# Altium PCB PCB1.PcbDoc
Units mil, origin at the board's own origin, x right, y up, seen from the top; angles counter-clockwise.
Board outline 3540 x 2100.23 mil, 2 copper layers (Top Layer, Bottom Layer); 18 components, 15 nets, 161 pads, 3 vias.
Unrouted connection lines stored in the file: 20.
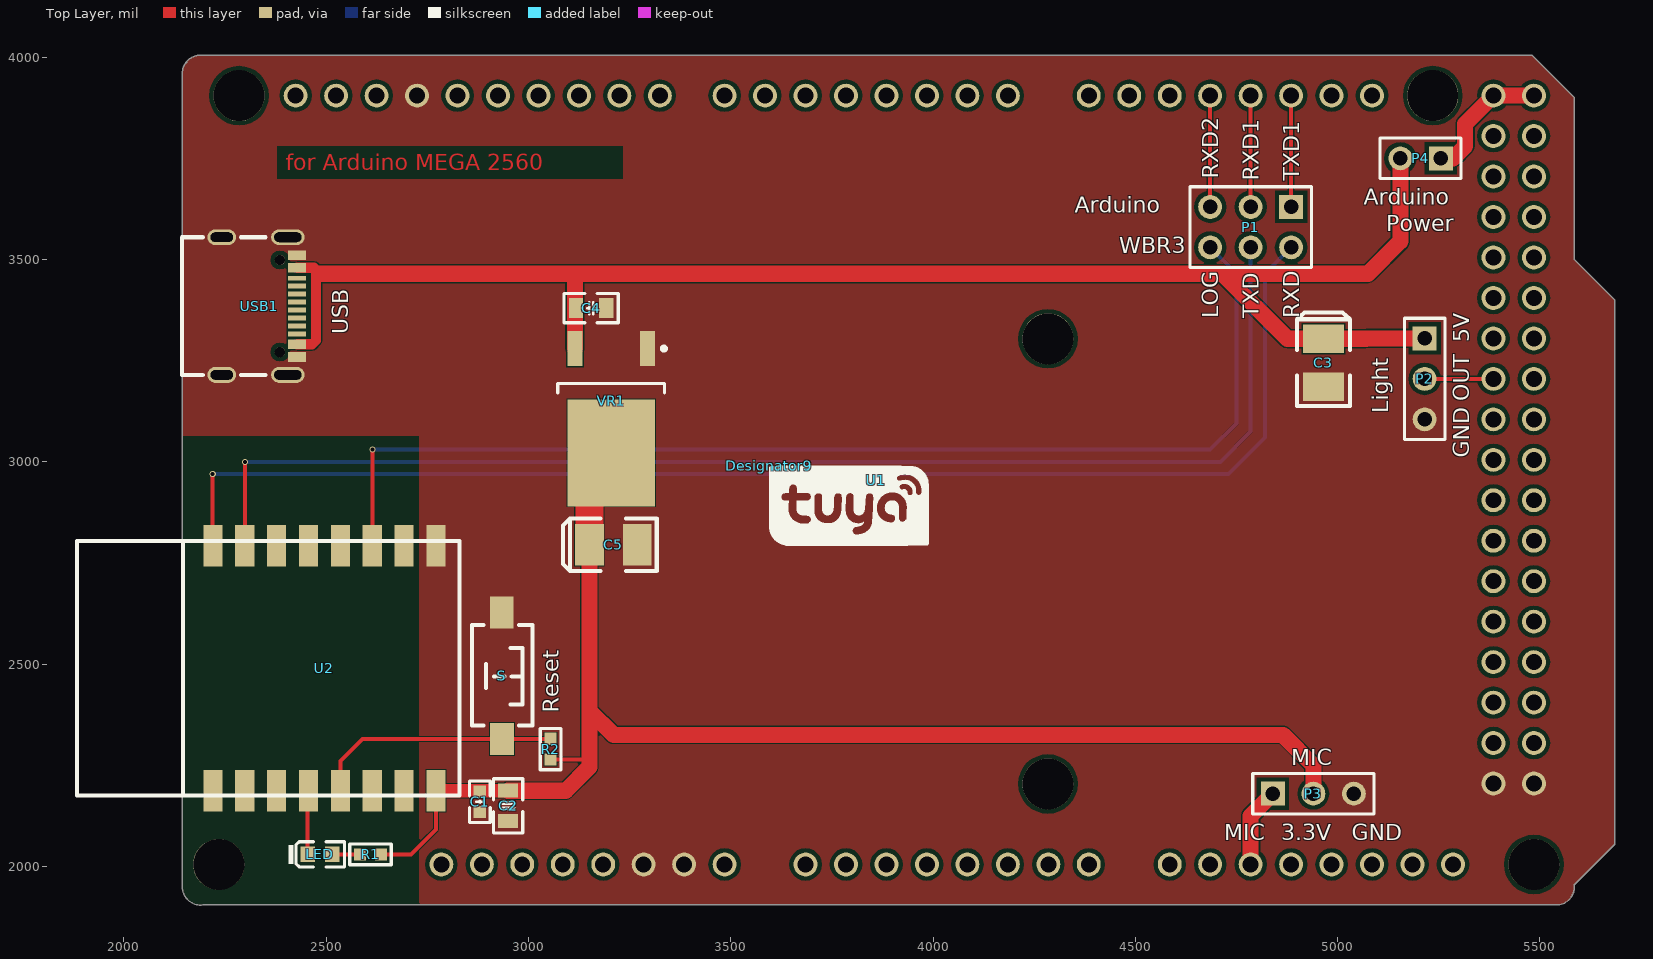
[diagram p0: Top Layer view]
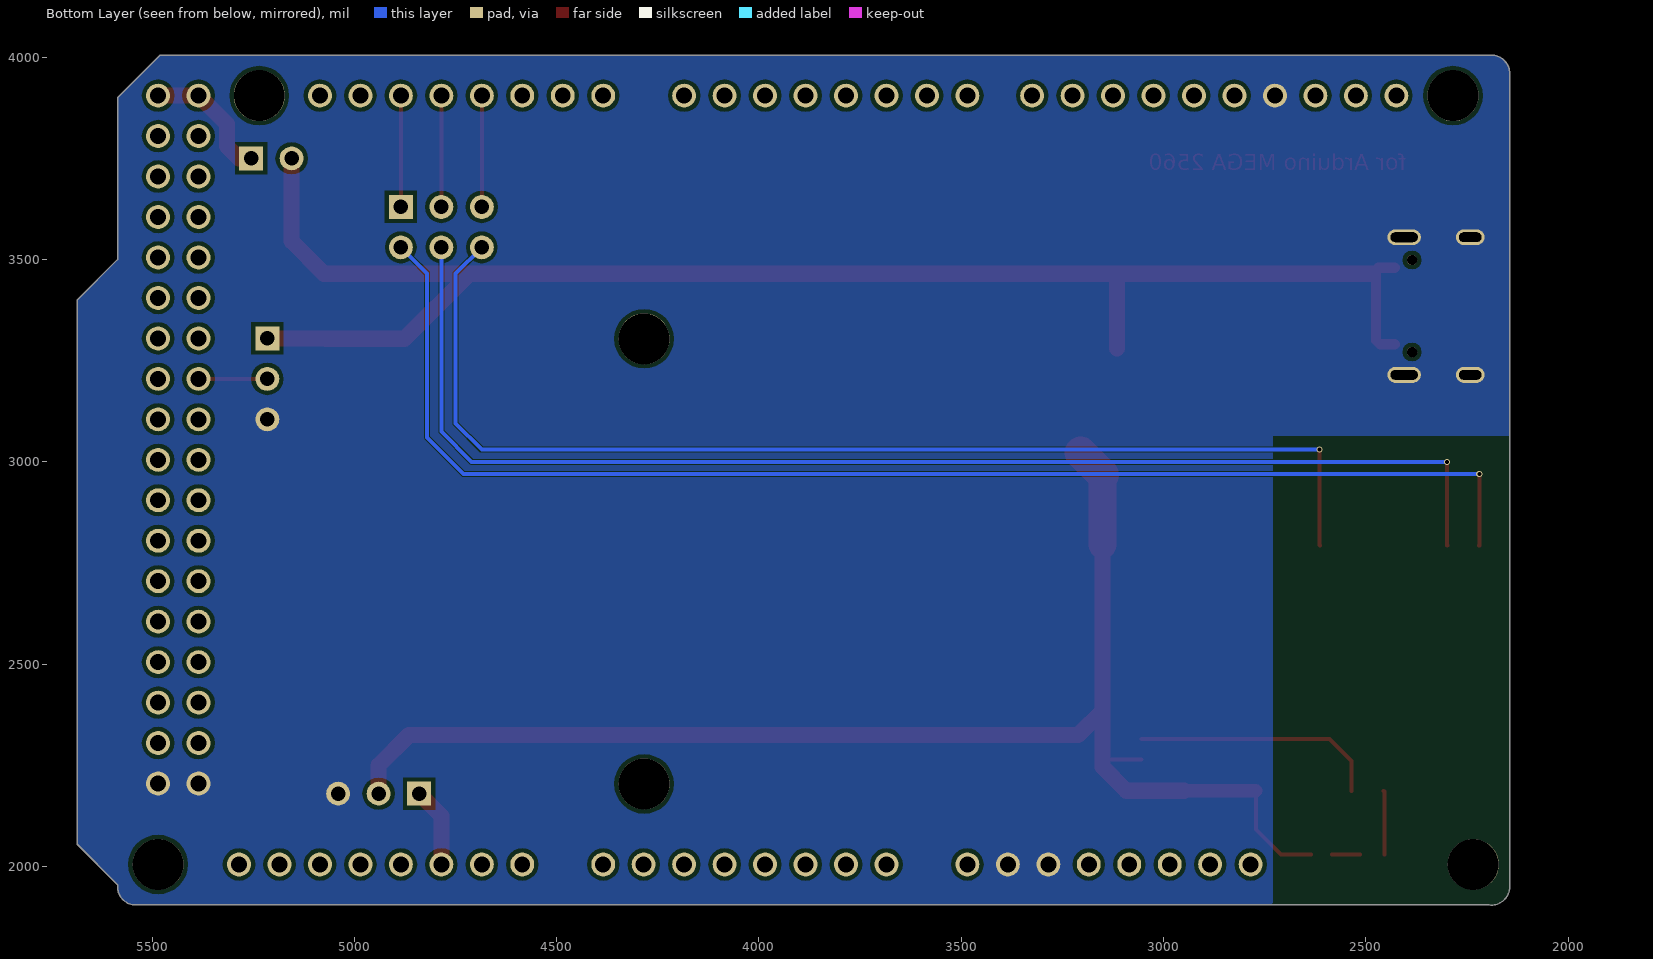
[diagram p1: Bottom Layer view, seen from below]

## Layer stack, top to bottom
Top Solder: solder mask 0.4, Solder Resist, Dk 3.5
Top Layer: signal copper 1.4
Dielectric 1: dielectric 12.6, FR-4, Dk 4.8
Bottom Layer: signal copper 1.4
Bottom Solder: solder mask 0.4, Solder Resist, Dk 3.5

## Board outline
2145,1945 ccw(c2190,1950) 2195,1905 5545,1905 ccw(c5540,1950) 5585,1955 5685,2055 5685,3400 5585,3500 5585,3900 5480,4005 2190,4005 ccw(c2190,3960) 2145,3960

## Design rules (kind name [scope] priority, off if disabled: settings)
Clearance [All] p1: gap=3 ignorepadtopadclearanceinfootprint=FALSE except(0: Arc-Hole Track-Hole SMDPad-Hole THPad-Hole Via-Hole Fill-Hole Poly-Hole Region-Hole Text-Hole; 10: THPad-Via THPad-Fill THPad-Poly THPad-Region THPad-Text Via-Via Via-Fill Via-Poly Via-Region Via-Text Fill-Fill Fill-Poly Fill-Region Fill-Text Poly-Poly Poly-Region Poly-Text Region-Region Region-Text Text-Text)
ComponentClearance [All] p1 off: gap=10 collisioncheckmode=3 verticalgap=10 showdistances=FALSE
HoleSize [All] p1 off: absolutevalues=TRUE maxlimit=100 minlimit=1 maxpercent=80.000 minpercent=20.000
MinimumSolderMaskSliver [All] p1 off: minsoldermaskwidth=10
PlaneConnect [All] p1: planeconnectstyle=Direct reliefexpansion=20 reliefentries=4 reliefconductorwidth=10 reliefairgap=10
PolygonConnect [All] p1: connectstyle=Direct reliefconductorwidth=10 reliefentries=4 polygonreliefangle="90 Angle" airgapwidth=10
RoutingVias [All] p1: holewidth=28 width=50 viastyle="Through Hole" minholewidth=28 minwidth=50 maxholewidth=28 maxwidth=50
SilkToSolderMaskClearance [IsPad] p1 off: minsilkscreentomaskgap=10 clearancetoexposedcopper=TRUE
SolderMaskExpansion [All] p1: expansion=4
Width [All] p1: maxlimit=100 minlimit=10 preferedwidth=10 minimp=50.000000 maximp=50.000000 favimp=50.000000
25 further rules are at their usual default settings.

## Classes and differential pairs
component class Sheet1: C1 C2 C3 C4 C5 LED P1 P2 P3 P4 R1 R2 S U1 U2 USB1 VR1

## Components (designator, comment, footprint, x,y, rotation, side; value= is the part's Value field where it differs from the comment)
C1 "Cap" "C 0603_L" 2880,2160 r90 top value=100nF
C2 "Cap" "C 0805_L" 2950,2150 r90 top value=10uF
C3 "100uF (107) ±10% 6.3V" CASE-B_3528 4965,3245 r90 top
C4 "10uF (106) 10% 25V" "C 0805_L" 3155,3380 r180 top
C5 "100uF (107) ±10% 6.3V" CASE-B_3528 3210,2795 r180 top
Designator9 "Comment" toya_logo 3595,2990 r0 top
LED "LED0" 0603_LED_S1 2485,2030 r0 top
P1 "Header 3X2" HDR2X3 4885,3630 r180 top
P2 "Header 3" HDR1X3 5215,3305 r270 top
P3 "Header 3" HDR1X3 4840,2180 r0 top
P4 "Header 2" HDR1X2 5255,3750 r180 top
R1 "Res2" "R 0603_L" 2610,2030 r180 top value=1K
R2 "Res2" "R 0603_L" 3055,2290 r90 top value=1K
S "SW-PB" "TSW SMD-3*6*2.5" 2935,2470 r270 top
U1 "arduino mega" "arduino mega" -1215,-295 r0 top locked
U2 "WIFI_BLE_WBR3" WBR3 1885,2175 r90 top
USB1 "TYPE-C 16P(073)" USB-C-SMD_TYPE-C16PIN 2140,3385 r270 top
VR1 "ME1117A33K3G" TO-252 3204.76,3106.77 r270 top

## Footprints (in the part's own frame and the unit in brackets; to place one, negate y for a bottom-side part, rotate by r counter-clockwise, add the part's x,y. Pads: shape width x height; smd on the part's side, far side on the other; paste and mask are expansions set on the pad)
0603_LED_S1 [mm]
  rect 0.93x0.98 smd: A(0.77,0) K(-0.77,0)
  silkscreen extent -1.98,-0.79 1.54,0.79, body extent -0.8,-0.4 0.8,0.4, height 0.6
"arduino mega" [mm]
  round 1.5 hole 1: 0(137.16,106.68) 1(134.62,106.68) 2(132.08,106.68) 3(129.54,106.68) 4(127,106.68) 5(124.46,106.68) 6(121.92,106.68) 7(119.38,106.68) 8(115.316,106.68) 9(112.776,106.68) 10(110.236,106.68) 11(107.696,106.68) 12(105.156,106.68) 13(102.616,106.68) 14(142.24,106.68) 15(144.78,106.68) 16(147.32,106.68) 17(149.86,106.68) 18(152.4,106.68) 19(154.94,106.68) 20(157.48,106.68) 21(160.02,106.68) 22(167.64,104.14) 23(170.18,104.14) 24(167.64,101.6) 25(170.18,101.6) 26(167.64,99.06) 27(170.18,99.06) 28(167.64,96.52) 29(170.18,96.52) 30(167.64,93.98) 31(170.18,93.98) 32(167.64,91.44) 33(170.18,91.44) 34(167.64,88.9) 35(170.18,88.9) 36(167.64,86.36) 37(170.18,86.36) 38(167.64,83.82) 39(170.18,83.82) 40(167.64,81.28) 41(170.18,81.28) 42(167.64,78.74) 43(170.18,78.74) 44(167.64,76.2) 45(170.18,76.2) 46(167.64,73.66) 47(170.18,73.66) 48(167.64,71.12) 49(170.18,71.12) 50(167.64,68.58) 51(170.18,68.58) 52(167.64,66.04) 53(170.18,66.04) 54(94.996,106.68) 55(92.456,106.68) 60(124.46,58.42) 61(127,58.42) 62(129.54,58.42) 63(132.08,58.42) 64(134.62,58.42) 65(137.16,58.42) 66(139.7,58.42) 67(142.24,58.42) 68(147.32,58.42) 69(149.86,58.42) 70(152.4,58.42) 71(154.94,58.42) 72(157.48,58.42) 73(160.02,58.42) 74(162.56,58.42) 75(165.1,58.42) 80(97.536,106.68) 81(100.076,106.68) 82(101.6,58.42) 83(104.14,58.42) 84(106.68,58.42) 85(109.22,58.42) 86(111.76,58.42) 87(114.3,58.42) 88(116.84,58.42) 89(119.38,58.42) 90(167.64,106.68) 91(170.18,106.68) 92(167.64,63.5) 93(170.18,63.5)
  round 3.2 hole 3.2 unplated: ""(87.63,58.42) ""(88.9,106.68) ""(139.675,63.476) ""(139.675,91.416) ""(163.83,106.68) ""(170.18,58.42)
"C 0603_L" [mil] "无极性贴片电容                                       淘宝ID:黄晶宝石"
  rect 30x30 smd: 1(-25.59,0) 2(25.59,0)
  silkscreen extent -51,-26 51,26, body extent -31,-16 31,16, height 32
"C 0805_L" [mil] "无极性贴片电容                                        淘宝ID:黄晶宝石"
  rect 35x50 smd: 1(-37.4,0) 2(37.4,0)
  silkscreen extent -67,-36 67,36, body extent -39,-24 39,24, height 20
CASE-B_3528 [mm]
  rect 1.8x2.6 smd: 1(1.5,0) 2(-1.5,0)
  silkscreen extent -2.73,-1.65 3.16,1.65, body extent -1.85,-1.47 1.85,1.46, height 2.03
HDR1X2 [mm] "Connector; Header; 2 Position"
  rect 1.5x1.5 hole 0.9: 1(0,0)
  round 1.5 hole 0.9: 2(2.54,0)
  silkscreen extent -1.27,-1.27 3.81,1.27
HDR1X3 [mm] "Connector; Header; 3 Position"
  rect 1.5x1.5 hole 0.9: 1(0,0)
  round 1.5 hole 0.9: 2(2.54,0) 3(5.08,0)
  silkscreen extent -1.27,-1.27 6.35,1.27
HDR2X3 [mm] "Connector; Header; 3x2 Position"
  rect 1.5x1.5 hole 0.9: 1(0,0)
  round 1.5 hole 0.9: 2(0,2.54) 3(2.54,0) 4(2.54,2.54) 5(5.08,0) 6(5.08,2.54)
  silkscreen extent -1.27,-1.27 6.35,3.81
"R 0603_L" [mil] "1/10W贴片电阻                 淘宝ID:黄晶宝石"
  rect 30x30 smd: 1(-25.59,0) 2(25.59,0)
  silkscreen extent -51,-26 51,26, body extent -31,-16 32,16, height 16
TO-252 [mm]
  rect 2.2x0.95 smd: 1(-4.4,2.28) 3(-4.4,-2.28)
  rect 6.7x5.5 smd: 2(2.15,0)
  silkscreen extent -4.52,-3.35 -1.6,3.43, body extent -4.9,-3.27 5.04,3.27, height 2.39
toya_logo [mil]
  silkscreen extent 0,-197 395,0
"TSW SMD-3*6*2.5" [mm] "3*6*2.5mm"
  rect 2x1.5 smd: 1(-3.996,-0.02) 2(3.937,0)
  silkscreen extent -3.21,-1.9 3.09,1.9, body extent -4,-1.88 4,1.62, height 2.59
USB-C-SMD_TYPE-C16PIN [mm] "C668624"
  oval 1x2.099 hole 0.6 slot 1.7 at 90 deg: 1(-4.32,6.75) 2(4.32,6.75)
  oval 1x1.799 hole 0.6 slot 1.4 at 90 deg: 3(-4.32,2.6) 4(4.32,2.6)
  rect 0.6x1.15 smd: A1B12(-3.2,7.325) A4B9(-2.4,7.325) B1A12(3.2,7.325) B4A9(2.4,7.325)
  rect 0.3x1.15 smd: A5(-1.25,7.325) A6(-0.25,7.325) A7(0.25,7.325) A8(1.25,7.325) B5(1.75,7.325) B6(0.75,7.325) B7(-0.75,7.325) B8(-1.75,7.325)
  round 0.65 hole 0.65 unplated: ""(-2.89,6.25) ""(2.89,6.25)
  silkscreen extent -4.32,0.1 4.32,5.34
WBR3 [mm]
  rect 2.6x1.2 smd: 1(0.3,-8.52) 2(0.3,-10.52) 3(0.3,-12.52) 4(0.3,-14.52) 5(0.3,-16.52) 6(0.3,-18.52) 7(0.3,-20.52) 8(0.3,-22.52) 9(15.7,-22.52) 10(15.7,-20.52) 11(15.7,-18.52) 12(15.7,-16.52) 13(15.7,-14.52) 14(15.7,-12.52) 15(15.7,-10.52) 16(15.7,-8.52)
  silkscreen extent 0,-24 16,0

## Part data
C1 C2: "Capacitor", LatestRevisionDate=17-Jul-2002, LatestRevisionNote="Re-released for DXP Platform.", PackageDescription="Radial Cap, Thru-Hole; 2 Leads; 0.3 in Pin Spacing", PackageReference=RAD-0.3, Published=8-Jun-2000, Publisher="Altium Limited"
C3 C5: library part "3528 100uF (107) 10% 6.3V", "钽电容", Package=3528, SuppliersPartNumber=C16133, ComponentLink1Description=供应商链接, ComponentLink1URL=http://www.szlcsc.com/product/details_16815.html, Supplier=LC
C4: library part "0805 10uF (106) 10% 25V", "贴片电容", Package=0805, SuppliersPartNumber=C15850, ComponentLink1Description=供应商链接, ComponentLink1URL=http://www.szlcsc.com/product/details_16532.html, Supplier=LC
LED: "Typical INFRARED GaAs LED", LatestRevisionDate=08-Jul-2005, LatestRevisionNote="Mech Layer 1 removed.", PackageDescription="LED; 2 Leads", PackageReference=LED-0, Published=8-Jun-2000, Publisher="Altium Limited"
P1: "Header, 3-Pin, Dual row", LatestRevisionDate=17-Jul-2002, LatestRevisionNote="Re-released for DXP Platform.", Publisher="Altium Limited"
P2 P3: "Header, 3-Pin", LatestRevisionDate=17-Jul-2002, LatestRevisionNote="Re-released for DXP Platform.", Publisher="Altium Limited"
P4: "Header, 2-Pin", LatestRevisionDate=17-Jul-2002, LatestRevisionNote="Re-released for DXP Platform.", Publisher="Altium Limited"
R1 R2: "Resistor", LatestRevisionDate=17-Jul-2002, LatestRevisionNote="Re-released for DXP Platform.", PackageDescription="Axial Device, Thru-Hole; 2 Leads; 0.4 in Pin Spacing", PackageReference=AXIAL-0.4, Published=8-Jun-2000, Publisher="Altium Limited"
S: "Switch", LatestRevisionDate=17-Jul-2002, LatestRevisionNote="Re-released for DXP Platform.", PackageDescription="Switch; 2 Leads", PackageReference=SPST-2, Published=24-Mar-1999, Publisher="Altium Limited"
U2: library part WBR3, "Module"
USB1: BOM_Manufacturer="SHOU HAN", BOM_Manufacturer Part="TYPE-C 16P(073)", BOM_Supplier=LCSC, BOM_Supplier Part=C668624, Contributor=LCSC, spicePre=U, spiceSymbolName="TYPE-C 16P(073)"
VR1: library part "SOT-223 AMS1117-3.3", "低压差线性稳压(LDO)", Package=SOT-223, SuppliersPartNumber=C427608, ComponentLink1Description=供应商链接, ComponentLink1URL=https://item.szlcsc.com/421848.html, Supplier=LC

## Via types
v1: diameter 15, hole 10, Top Layer to Bottom Layer, 3 vias

## Nets (pads, with @x,y where several pads share a name; then routed paths per layer and width w, separated by ;. In a path a pad name is that pad's centre, name@x,y a point inside that pad or via, vN(x,y) a via of type N, cw(c..) or ccw(c..) an arc to the next point about the centre after c; other vN are vias at no path point)
3.3V: C1.2 C2.2 C5.1 P3.2 R1.1 R2.1 U2.8 VR1.2 | length 3477.6
  Top Layer w10: R1.1 2710,2030 2771.61,2091.61 U2.8 U2.8@2772.2,2187.4 ; R2.1 3132.48,2264.41 3150.94,2245.94
  Top Layer w33: U2.8@2772.2,2187.4 C2.2
  Top Layer w40: C2.2 3092.4,2187.4 3150.94,2245.94 3150.94,2385 ; C5.1 3150.94,2385 ; P3.2 4940,2250 4865,2325 3210.94,2325 3150.94,2385
  Top Layer w70: C5.1 VR1.2@3150.94,2968.31
  Top Layer w80: VR1.2@3150.94,2968.31 VR1.2
5V: C3.1 C4.2 P2.1 P4.2 USB1.A4B9 USB1.B4A9 VR1.3 | length 3921.7
  Top Layer w25: USB1.B4A9 2465.51,3290.51 2475,3300 2475,3475 2470.51,3479.49 USB1.A4B9
  Top Layer w40: 2485,3465 4715,3465 ; VR1.3 3115,3385 3115,3452.5 ; P4.2 5155,3545 5075,3465 4825,3465 4715,3465 ; P2.1 5070.94,3305 5070,3304.06 4875.94,3304.06 4715,3465
5V_MCU: P4.1 U1.90 U1.91 | length 326.4
  Top Layer w40: P4.1 5285,3750 5315,3780 5315,3835 U1.90 U1.91
GND: C1.1 C2.1 C3.2 C4.1 C5.2 P2.3 P3.3 S.1 U1.81 U1.87 U1.88 U1.92 U1.93 U2.9 USB1.1 USB1.2 USB1.3 USB1.4 USB1.A1B12 USB1.B1A12 VR1.1
LED: LED.K U2.4 | length 157.6
  Top Layer w10: LED.K 2454.69,2184.84 U2.4
LOG: P1.5 U1.17 | length 275
  Top Layer w10: P1.5 U1.17
MIC: P3.1 U1.70 | length 197.8
  Top Layer w40: U1.70 4785,2125 P3.1
NetLED_1: LED.A R1.2 | length 69.1
  Top Layer w10: LED.A R1.2
NetP1_2: P1.2 U2.16 | length 3311.3
  Top Layer w10: v1(2220,2970) 2220,2793.54 U2.16
  Bottom Layer w10: v1(2220,2970) 4730,2970 4820,3060 4820,3465 P1.2
NetP1_4: P1.4 U2.15 | length 3178.3
  Top Layer w10: U2.15 2300,2793.94 v1(2300,3000)
  Bottom Layer w10: v1(2300,3000) 4710,3000 4785,3075 P1.4
NetP1_6: P1.6 U2.11 | length 2861.1
  Top Layer w10: U2.11 2615,2793.98 v1(2615,3030)
  Bottom Layer w10: v1(2615,3030) 4685,3030 4750,3095 4750,3465 P1.6
OUT: P2.2 U1.34 | length 170
  Top Layer w10: P2.2 U1.34
RESET: R2.2 S.2 U2.5 | length 616.1
  Top Layer w10: U2.5 2535.39,2260.39 2590,2315 S.2 3054.42,2315 R2.2
RXD: P1.3 U1.18 | length 275
  Top Layer w10: P1.3 U1.18
TXD: P1.1 U1.19 | length 275
  Top Layer w10: P1.1 U1.19
pads on no net: U1. U1.0 U1.1 U1.2 U1.3 U1.4 U1.5 U1.6 U1.7 U1.8 U1.9 U1.10 U1.11 U1.12 U1.13 U1.14 U1.15 U1.16 U1.20 U1.21 U1.22 U1.23 U1.24 U1.25 U1.26 U1.27 U1.28 U1.29 U1.30 U1.31 U1.32 U1.33 U1.35 U1.36 U1.37 U1.38 U1.39 U1.40 U1.41 U1.42 U1.43 U1.44 U1.45 U1.46 U1.47 U1.48 U1.49 U1.50 U1.51 U1.52 U1.53 U1.54 U1.55 U1.60 U1.61 U1.62 U1.63 U1.64 U1.65 U1.66 U1.67 U1.68 U1.69 U1.71 U1.72 U1.73 U1.74 U1.75 U1.80 U1.82 U1.83 U1.84 U1.85 U1.86 U1.89 U2.1 U2.2 U2.3 U2.6 U2.7 U2.10 U2.12 U2.13 U2.14 USB1. USB1.A5 USB1.A6 USB1.A7 USB1.A8 USB1.B5 USB1.B6 USB1.B7 USB1.B8

## Polygon pours and split planes (outlines as drawn)
GND on Top Layer "Top Layer-No Net" (solid, pour order 0): 2145,1945 ccw(c2190,1950) 2195,1905 5545,1905 ccw(c5540,1950) 5585,1955 5685,2055 5685,3400 5585,3500 5585,3900 5480,4005 2190,4005 ccw(c2190,3960) 2145,3960
GND on Bottom Layer "Top Layer-No Net1" (solid, pour order 1): 2145,1945 ccw(c2190,1950) 2195,1905 5545,1905 ccw(c5540,1950) 5585,1955 5685,2055 5685,3400 5585,3500 5585,3900 5480,4005 2190,4005 ccw(c2190,3960) 2145,3960

## Other copper
Top Layer:
  pour cut-out: 2145,3065 2730,3065 2730,1905 2145,1905
  text "for Arduino MEGA 2560" at 2400,3720 h40
Bottom Layer:
  pour cut-out: 2145,3065 2730,3065 2730,1905 2145,1905

## Silkscreen, mask and mechanical layers (free items; w line width, h text height)
Top Overlay:
  text "RXD2" at 4705,3700 h40 r90
  text "RXD1" at 4805,3695 h40 r90
  text "TXD1" at 4905,3695 h40 r90
  text "Arduino" at 5065,3635 h40
  text "Arduino" at 4350,3615 h40
  text "Power" at 5120,3570 h40
  text "WBR3" at 4460,3515 h40
  text "LOG" at 4705,3355 h40 r90
  text "TXD" at 4805,3355 h40 r90
  text "RXD" at 4905,3355 h40 r90
  text "USB" at 2555,3315 h40 r90
  text "5V" at 5325,3295 h40 r90
  text "OUT" at 5325,3150 h40 r90
  text "Light" at 5125,3120 h40 r90
  text "GND" at 5325,3010 h40 r90
  text "Reset" at 3075,2380 h40 r90
  text "MIC" at 4885,2250 h40
  text "MIC" at 4720,2065 h40
  text "3.3V" at 4860,2065 h40
  text "GND" at 5035,2065 h40
Top Solder:
  text "for Arduino MEGA 2560" at 2400,3720 h40
Mechanical 1:
  the board outline again, w10